# EAGLE board ECE445_EagleHW (EAGLE 9.5.2)
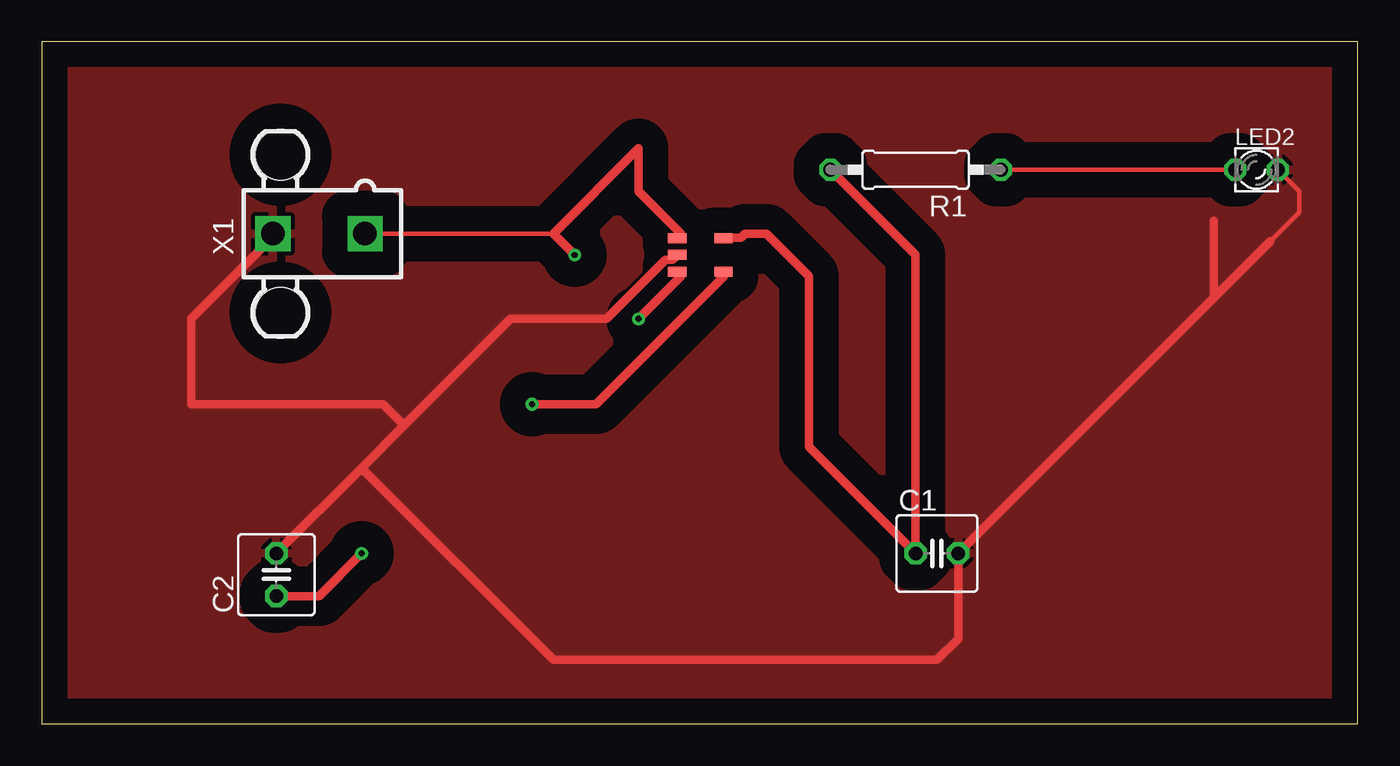
[diagram p0: board, top side]
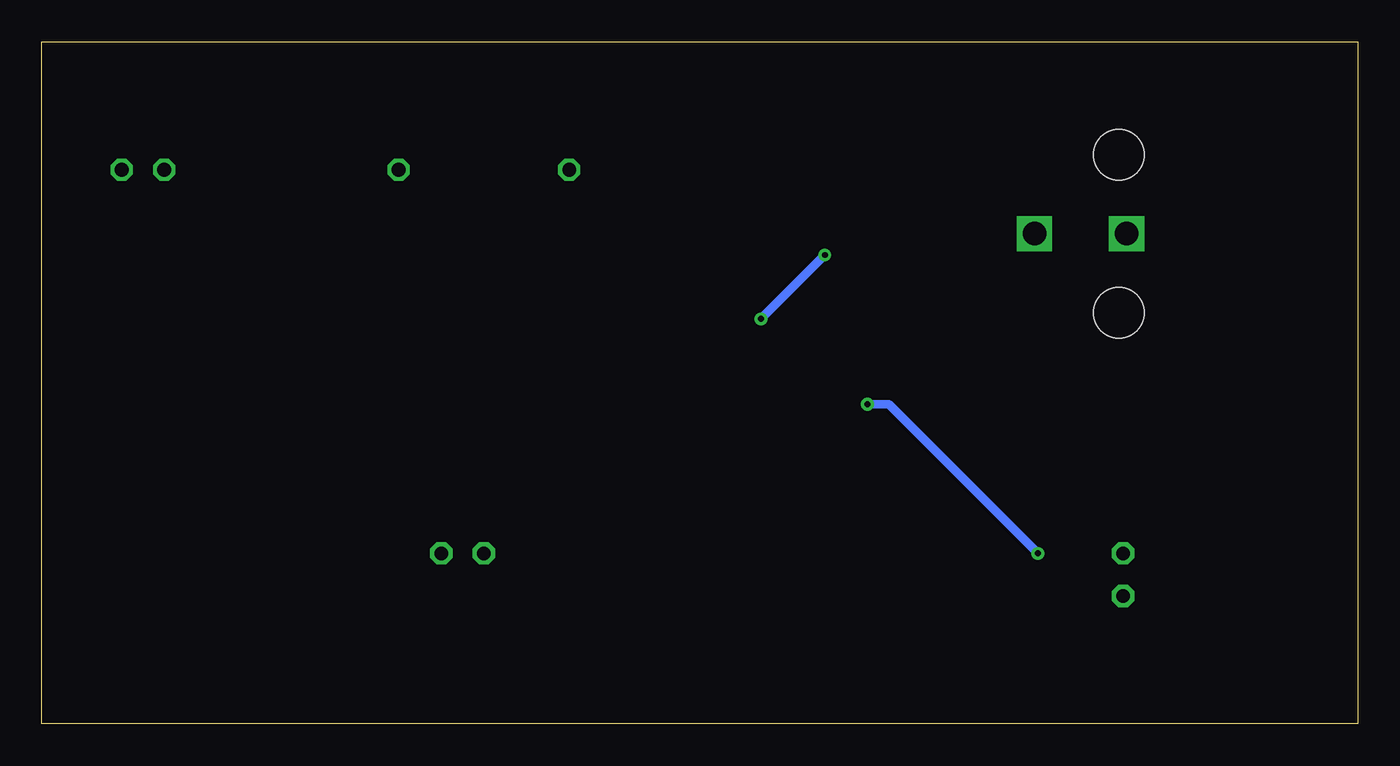
[diagram p1: board, bottom side, seen from below]

Size 78.41 x 40.63 mm. Coordinates in mm from the lower left corner, seen from the top.
Outline: 0,0 78.41,0 78.41,40.63 0,40.63 0,0
Copper layers (1*16): Top 0.035mm / dielectric 1.5mm / Bottom 0.035mm
Design rules "default": minimum track width 6mil, minimum drill 0.35mm, track to track 6mil, track to pad 6mil, pad to pad 6mil, via to via 6mil, smd to smd 6mil, copper to edge 40mil, drill to drill 6mil, minimum pad ring 10mil, minimum via ring 8mil, stop-mask expansion 4mil, vias tented up to drill 0mil, thermal gap 10mil

## Footprints (pad centres in the part's own frame; a part is rotated, then mirrored left to right if it is on the bottom)
C025-050X050 = drill 0.813 octagon: 1 -1.27,0; 2 1.27,0
LZR181 = drill 0.813 octagon: A -1.27,0; K 1.27,0
0207/10 = drill 0.813 octagon: 1 -5.08,0; 2 5.08,0
TPS799 = smd 1.1 x 0.6: 1 -1.5,1; 2 -1.5,0; 3 -1.5,-1; 4 1.25,1; 5 1.25,-1
5566-2 = drill 1.4 square: 1 0,-2.75; 2 0,2.75 | hole 3: 4.7,2.29; -4.7,2.29

## Placement (x,y rotation side)
C1  2.2x10^-6  [C025-050X050]  53.34,10.16 0 top
C2  2.2x10^-6  [C025-050X050]  13.97,8.89 90 top
LED2  [LZR181]  72.39,33.02 0 top
R1  100  [0207/10]  52.07,33.02 180 top
U$1  TPS799  [TPS799]  39.37,27.94 0 top
X1  5566-2  [5566-2]  16.51,29.21 90 top

## Library data of the parts
C1 C2 = rcl; SPICEPREFIX: C
LED2 = led
R1 = rcl; SPICEPREFIX: R
U$1 = TPS799
X1 = con-molex; MF: MOLEX; OC_FARNELL: 1822072; OC_NEWARK: unknown

## Nets
GND: C1.2 C2.2 LED2.K U$1.2 X1.2
N$2: C1.1 R1.2 U$1.4
N$3: LED2.A R1.1
N$4: C2.1 U$1.5
N$6: U$1.1 U$1.3 X1.1

## Tracks (layer width: path | path; a pad name or v marks a point on that pad's centre or on a via)
GND
  Top 0.254: 74.01,29.56 73.02,28.58 | LED2.K 74.93,31.75 74.93,30.48 71.12,26.67
  Top 0.508: C2.2 19.05,15.24 | 19.05,15.24 21.59,17.78 | 21.59,17.78 27.94,24.13 33.63,24.13 37.15,27.65 37.58,27.65 U$1.2 | 19.05,15.24 30.48,3.81 53.34,3.81 54.61,5.08 C1.2 69.85,25.4 | 13.97,29.21 8.89,24.13 8.89,19.05 20.32,19.05 21.59,17.78 | 69.85,25.4 71.12,26.67 73.02,28.58 73.2,28.75 | 69.85,25.4 69.85,29.98
  pour Top (isolate 1.524): 0,40.64 0,0 78.74,0 78.74,40.64
N$2
  Top 0.508: R1.2 52.07,27.94 C1.1 45.72,16.51 45.72,26.67 43.18,29.21 41.91,29.21 41.66,28.96 40.64,28.96 U$1.4
N$3
  Top 0.254: LED2.A R1.1
N$4  (via drill 0.35)
  Top 0.508: C2.1 16.51,7.62 v19.05,10.16 | v29.21,19.05 33.02,19.05 40.64,26.67 40.64,26.92 U$1.5
  Bottom 0.508: v19.05,10.16 27.94,19.05 v29.21,19.05
N$6  (via drill 0.35)
  Top 0.254: X1.1 30.48,29.21
  Top 0.508: v31.75,27.94 30.48,29.21 35.56,34.29 35.56,31.75 38.1,29.21 38.1,29.17 U$1.1 | v35.56,24.13 38.1,26.67 38.1,26.71 U$1.3 | 19.05,29.21 X1.1
  Bottom 0.508: v31.75,27.94 v35.56,24.13